# EAGLE board Rev B (Before Duplication) (EAGLE 6.5.0)
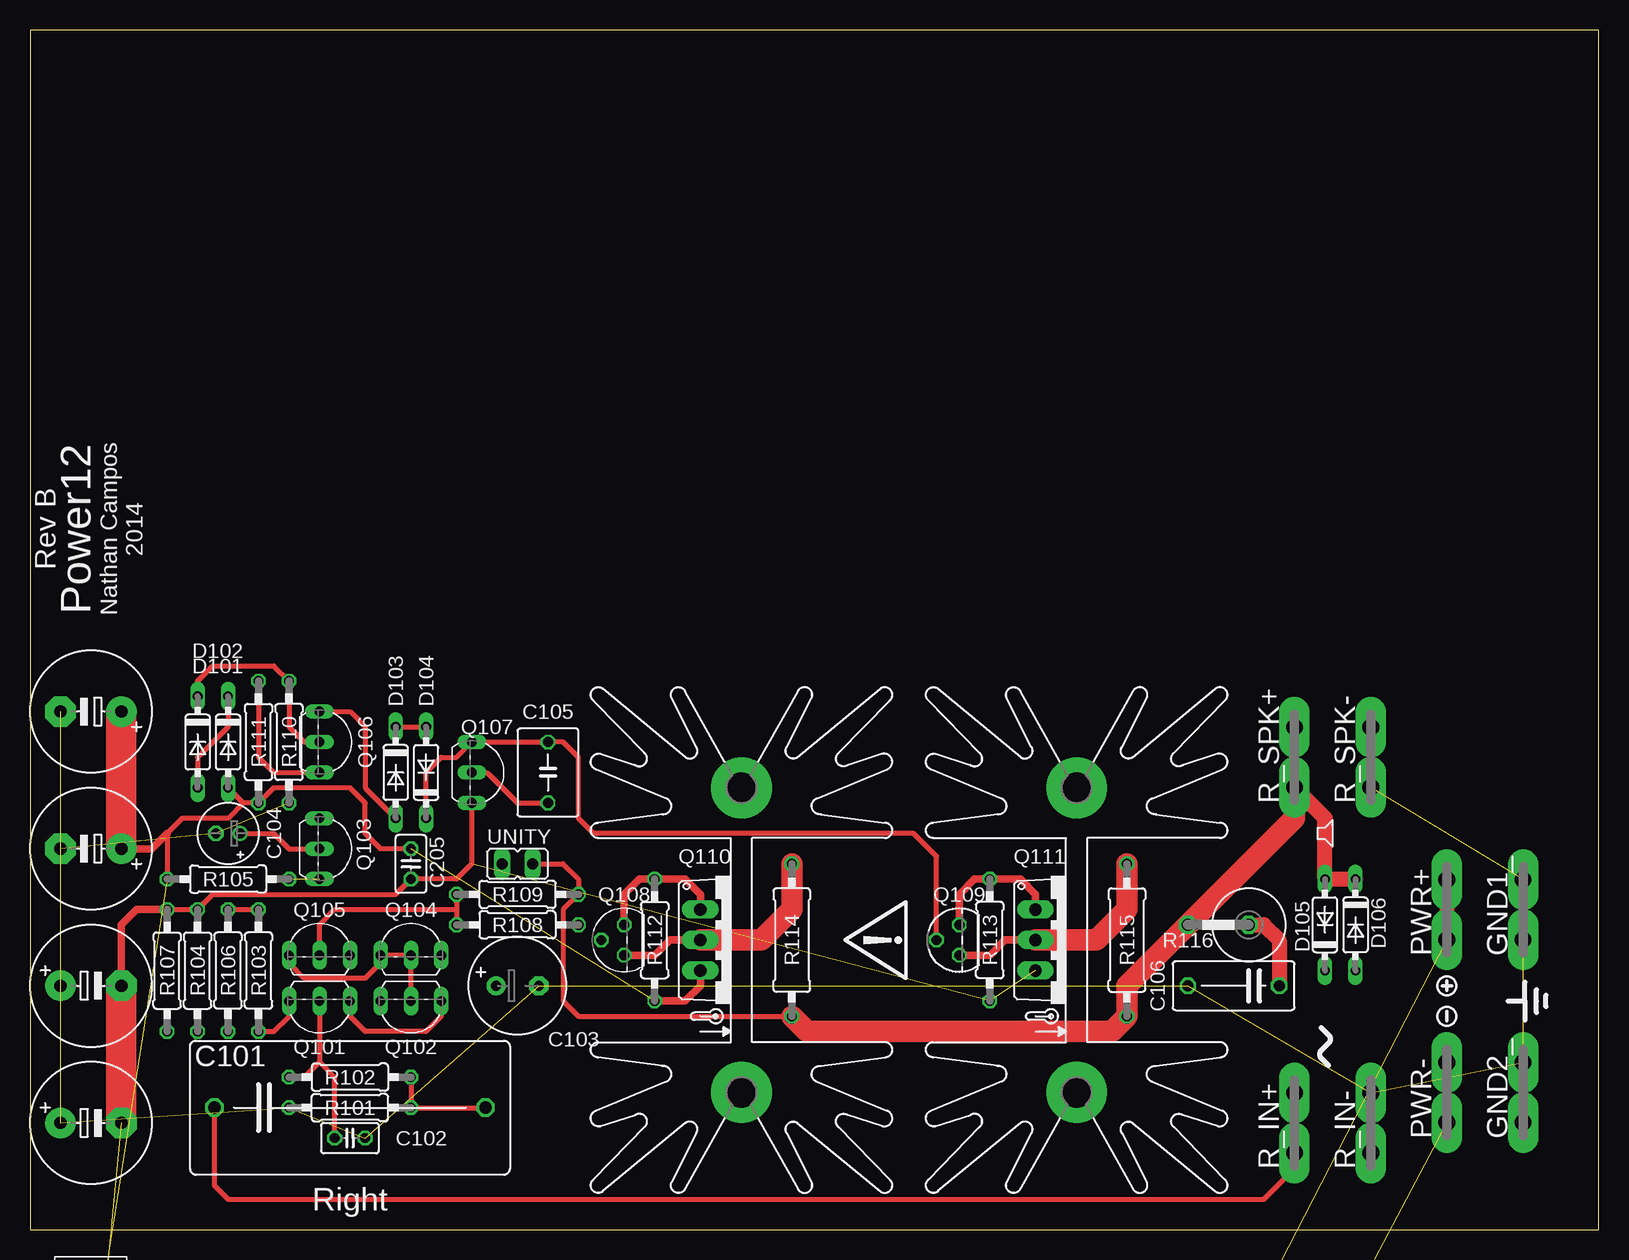
[diagram p0: board, top side]
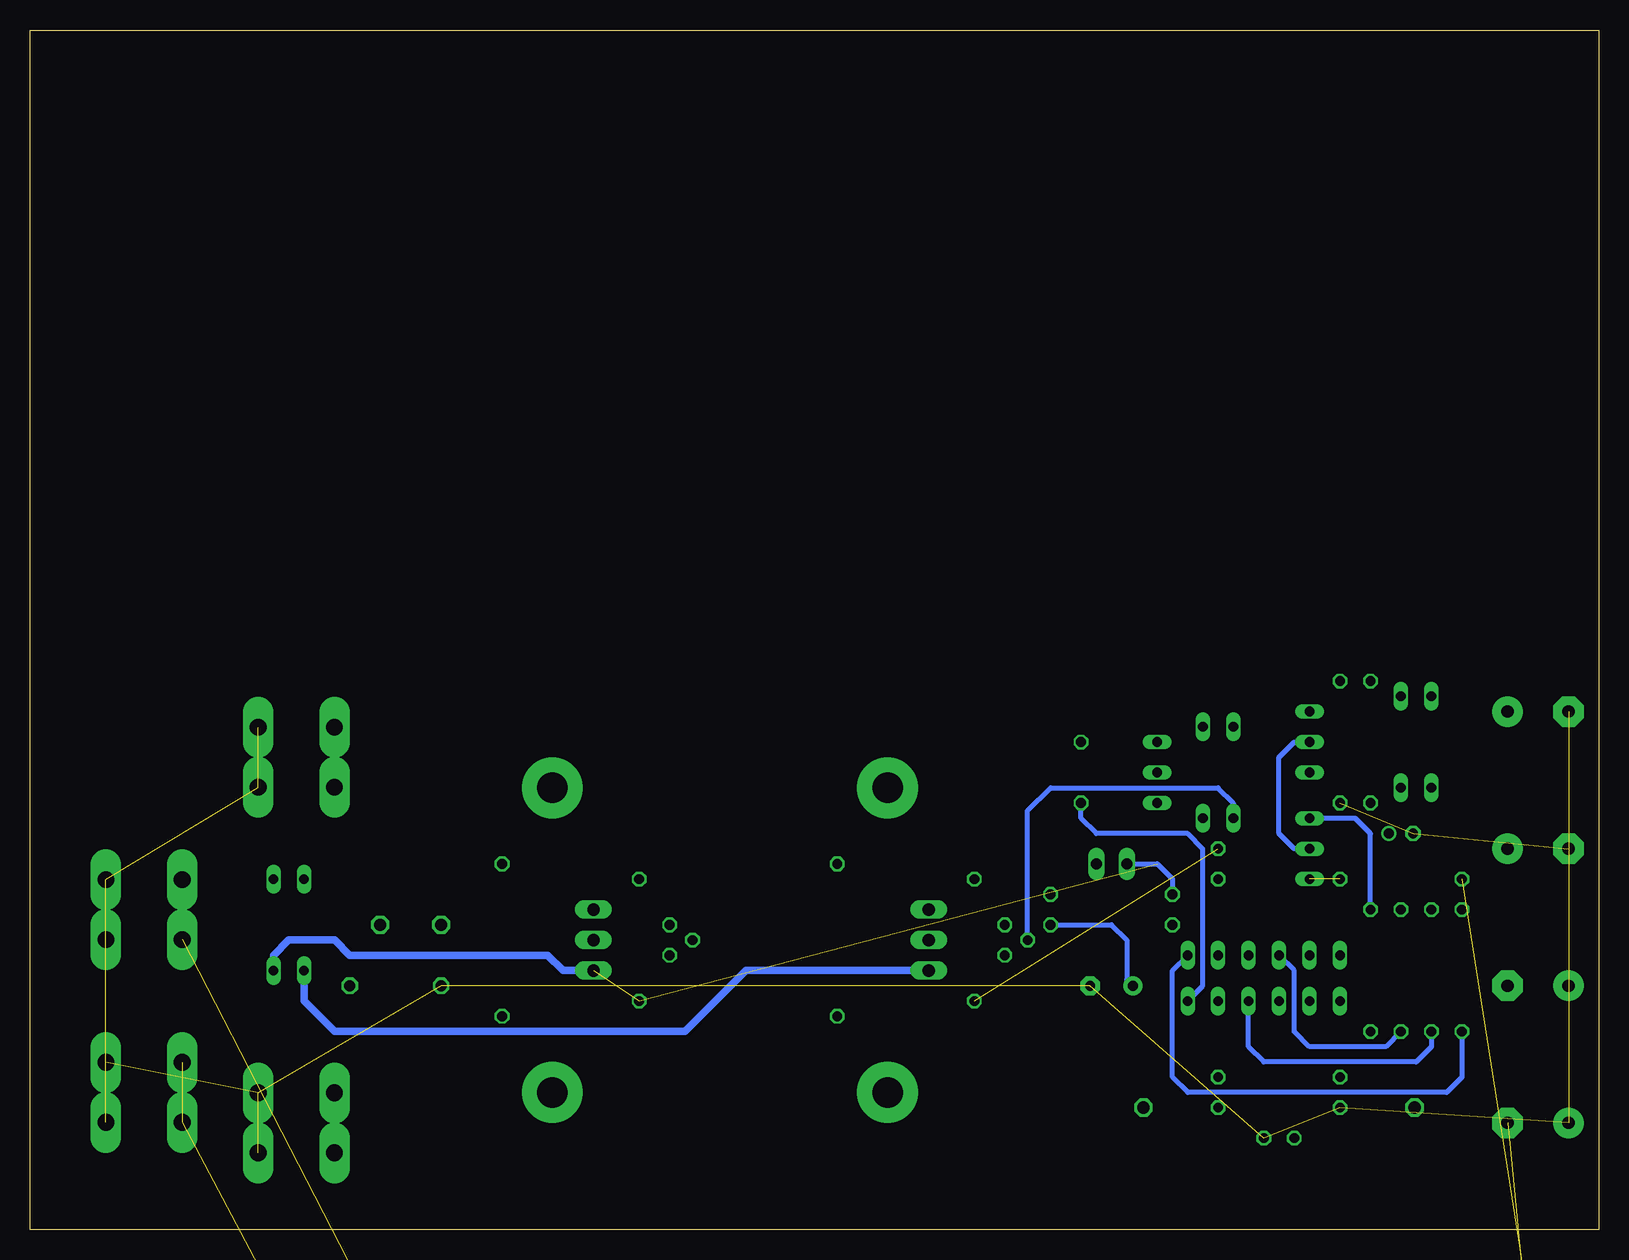
[diagram p1: board, bottom side, seen from below]

Size 130.79 x 100 mm. Coordinates in mm from the lower left corner, seen from the top.
Outline: 0,0 130.79,0 130.79,100 0,100 0,0
Copper layers (1*2*15*16): Top 0.035mm / dielectric 0.2mm / Route2 0.0175mm / dielectric 1.1mm / Route15 0.0175mm / dielectric 0.2mm / Bottom 0.035mm
Design rules "SeeedStudio_DRU_no_angle_20130527": minimum track width 6mil, minimum drill 12mil, track to track 6mil, track to pad 6mil, pad to pad 6mil, via to via 6mil, smd to smd 0mil, copper to edge 10mil, drill to drill 10mil, minimum pad ring 6mil, minimum via ring 6mil, stop-mask expansion 2mil, vias tented up to drill 25mil, thermal gap 10mil

## Footprints (pad centres in the part's own frame; a part is rotated, then mirrored left to right if it is on the bottom)
C225-113X268 = drill 1.016 octagon: 1 -11.303,0; 2 11.303,0
C025-025X050 = drill 0.813 octagon: 1 -1.27,0; 2 1.27,0
E3,5-8 = drill 0.813 pad 1.6: + -1.778,0 | drill 0.813 pad 1.6 octagon: - 1.778,0
E2-5 = drill 0.813 pad 1.27: + -1.016,0 | drill 0.813 pad 1.27 octagon: - 1.016,0
C050-050X075 = drill 0.813 octagon: 1 -2.54,0; 2 2.54,0
C075-042X103 = drill 0.914 octagon: 1 -3.81,0; 2 3.81,0
E5-10,5 = drill 1.016 pad 2.54: + -2.54,0 | drill 1.016 pad 2.54 octagon: - 2.54,0
DO35-7 = drill 0.813 long: A 3.81,0; C -3.81,0
F061.100 = drill 1.4 pad 2.54 long: A1 -2.5,0; A2 2.5,0
SK129 = drill 2.54 pad 5.08: A2,5 -12.7,-0.889; B2,5 12.7,-0.889
JST-PH-2-THM = drill 0.8 pad 1.422: 1 1,0; 2 -1,0
TO92-EBC = drill 0.813 long: B 0,-1.27; C -2.54,-1.27; E 2.54,-1.27
TO92 = drill 0.813 octagon: 1 1.27,0; 2 0,1.905; 3 -1.27,0
TO220AV = drill 1.016 long: B -2.54,-2.54; C 0,-2.54; E 2.54,-2.54
0207/10 = drill 0.813 octagon: 1 -5.08,0; 2 5.08,0
0309/12 = drill 0.813 octagon: 1 -6.35,0; 2 6.35,0
0617V = drill 1.016 octagon: 1 -2.54,0; 2 2.54,0
JP1 = drill 0.914 long: 1 0,-1.27; 2 0,1.27

## Placement (x,y rotation side)
C101  4.7uF  [C225-113X268]  26.67,10.16 0 top
C102  10nF  [C025-025X050]  26.67,7.62 0 top
C103  220uF  [E3,5-8]  40.64,20.32 0 top
C104  2.2uF  [E2-5]  16.51,33.02 180 top
C105  100pF  [C050-050X075]  43.18,38.1 90 top
C106  100n  [C075-042X103]  100.33,20.32 180 top
C201  2200uF  [E5-10,5]  5.08,20.32 0 top
C202  2200uF  [E5-10,5]  5.08,8.89 0 top
C203  2200uF  [E5-10,5]  5.08,31.75 180 top
C204  2200uF  [E5-10,5]  5.08,43.18 180 top
C205  100nF  [C025-025X050]  31.75,30.48 270 top
D101  1N4148DO35-7  [DO35-7]  16.51,40.64 270 top
D102  1N4148DO35-7  [DO35-7]  13.97,40.64 270 top
D103  1N4148DO35-7  [DO35-7]  30.48,38.1 270 top
D104  1N4148DO35-7  [DO35-7]  33.02,38.1 90 top
D105  1N4148DO35-7  [DO35-7]  107.95,25.4 90 top
D106  1N4148DO35-7  [DO35-7]  110.49,25.4 270 top
GND1_  PIN2F061.100  [F061.100]  124.46,26.67 90 top
GND2_  PIN2F061.100  [F061.100]  124.46,11.43 90 top
KK101  SK129-PAD  [SK129]  58.42,24.13 90 top
KK102  SK129-PAD  [SK129]  86.36,24.13 90 top
ON  [JST-PH-2-THM]  5.08,-5.08 0 top  (outside the outline)
PWR+  PIN2F061.100  [F061.100]  118.11,26.67 90 top
PWR-  PIN2F061.100  [F061.100]  118.11,11.43 90 top
Q101  BC560C  [TO92-EBC]  24.13,17.78 180 top
Q102  BC550B  [TO92-EBC]  31.75,17.78 180 top
Q103  BC560C  [TO92-EBC]  25.4,31.75 270 top
Q104  BC550B  [TO92-EBC]  31.75,24.13 0 top
Q105  BC560C  [TO92-EBC]  24.13,24.13 0 top
Q106  BC560C  [TO92-EBC]  25.4,40.64 270 top
Q107  BC550B  [TO92-EBC]  38.1,38.1 270 top
Q108  2N3904  [TO92]  49.53,24.13 90 top
Q109  2N3906  [TO92]  77.47,24.13 90 top
Q110  TIP42C  [TO220AV]  58.42,24.13 270 top
Q111  TIP41C  [TO220AV]  86.36,24.13 270 top
R101  10kΩ  [0207/10]  26.67,10.16 0 top
R102  100Ω  [0207/10]  26.67,12.7 180 top
R103  22Ω  [0207/10]  19.05,21.59 90 top
R104  56Ω  [0207/10]  13.97,21.59 270 top
R105  100Ω  [0207/10]  16.51,29.21 180 top
R106  22Ω  [0207/10]  16.51,21.59 90 top
R107  56Ω  [0207/10]  11.43,21.59 270 top
R108  560Ω  [0207/10]  40.64,25.4 180 top
R109  10kΩ  [0207/10]  40.64,27.94 0 top
R110  4.7kΩ  [0207/10]  21.59,40.64 90 top
R111  560  [0207/10]  19.05,40.64 270 top
R112  1kΩ  [0207/10]  52.07,24.13 270 top
R113  1kΩ  [0207/10]  80.01,24.13 90 top
R114  0.33Ω  [0309/12]  63.5,24.13 90 top
R115  0.33Ω  [0309/12]  91.44,24.13 270 top
R116  10Ω  [0617V]  99.06,25.4 180 top
R201  4.7kΩ  [0207/10]  -8.89,-214.63 0 top  (outside the outline)
R_IN+  PIN2F061.100  [F061.100]  105.41,8.89 90 top
R_IN-  PIN2F061.100  [F061.100]  111.76,8.89 90 top
R_SPK+  PIN2F061.100  [F061.100]  105.41,39.37 90 top
R_SPK-  PIN2F061.100  [F061.100]  111.76,39.37 90 top
SWT_IN+  PIN2F061.100  [F061.100]  -10.16,-219.71 0 top  (outside the outline)
SWT_IN-  PIN2F061.100  [F061.100]  -10.16,-228.6 0 top  (outside the outline)
SWT_OUT+  PIN2F061.100  [F061.100]  -10.16,-237.49 0 top  (outside the outline)
SWT_OUT-  PIN2F061.100  [F061.100]  -10.16,-246.38 0 top  (outside the outline)
U$1  [ICON_SPEAKER]  107.95,33.02 0 top
U$2  [ICON_GND2]  125.73,19.05 90 top
U$3  [ICON_PLUS]  118.11,20.32 90 top
U$4  [ICON_MINUS]  118.11,17.78 90 top
U$5  [ICON_TEMP]  85.09,17.78 90 top
U$6  [ICON_TEMP]  57.15,17.78 90 top
U$7  [ICON_AC]  107.95,15.24 90 top
U$9  [ICON_EXL-S]  71.12,24.13 90 top
UNITY  [JP1]  40.64,30.48 270 top

## Library data of the parts
C101-C106 C201-C205 R101-R116 R201 = rcl
D101-D106 = diode
GND1_ GND2_ PWR+ PWR- R_IN+ R_IN- R_SPK+ R_SPK- SWT_IN+ SWT_IN- SWT_OUT+ SWT_OUT- = con-faston; OC_FARNELL: unknown; OC_NEWARK: unknown
KK101 KK102 = heatsink
ON = adafruit
Q101 Q103 Q105 Q106 Q109 = transistor-pnp
Q102 Q104 Q107 Q108 = transistor-npn
Q110 Q111 = transistor-power
U$1-U$7 U$9 = dicons
UNITY = jumper

## Nets
GND: C102.2 C103.- C104.- C106.2 C201.+ C202.+ C203.- C204.- GND1_.A1 GND1_.A2 GND2_.A1 GND2_.A2 R101.1 R110.1 R_IN-.A1 R_IN-.A2 R_SPK-.A1 R_SPK-.A2
N$1: D103.A Q106.C Q108.2
N$2: Q105.E R106.1
N$3: Q102.B Q104.B Q104.C Q105.C
N$4: C102.1 Q101.B R102.2
N$5: C101.2 R101.2 R102.1
N$6: C104.+ D102.C Q103.B Q106.B R110.2
N$7: C101.1 R_IN+.A1 R_IN+.A2
N$8: C105.1 Q101.C Q102.C Q107.B
N$9: D101.C D102.A
N$10: ON.2 R201.2
N$11: Q106.E R111.1
N$12: C103.+ R108.1
N$13: Q102.E R104.2
N$14: Q104.E R107.2
N$16: C106.1 R116.1
N$18: Q101.E R103.1
N$19: Q103.C R103.2 R106.2
N$20: Q103.E R105.1
N$24: D103.C D104.A
N$26: Q108.1 Q110.B R112.1
N$27: Q109.1 Q111.B R113.2
N$28: Q109.3 Q111.C R115.1
N$29: Q108.3 Q110.C R114.2
N$31: C105.2 D104.C Q107.C Q109.2
N$32: Q105.B R108.2 R109.1 UNITY.1
R_OUT: D105.A D106.C R109.2 R114.1 R115.2 R116.2 R_SPK+.A1 R_SPK+.A2 UNITY.2
SWTIN+: PWR+.A1 PWR+.A2 SWT_IN+.A1 SWT_IN+.A2
SWTIN-: PWR-.A1 PWR-.A2 SWT_IN-.A1 SWT_IN-.A2
V+: C203.+ C204.+ C205.1 D101.A D105.C ON.1 Q110.E R105.2 R111.2 R112.2 SWT_OUT+.A1 SWT_OUT+.A2
V-: C201.- C202.- C205.2 D106.A Q107.E Q111.E R104.1 R107.1 R113.1 R201.1 SWT_OUT-.A1 SWT_OUT-.A2

## Tracks (layer width: path | path; a pad name or v marks a point on that pad's centre or on a via)
GND  (17 unrouted)
N$1
  Top 0.406: Q106.C 26.67,43.18 27.94,41.91 27.94,36.83 D103.A
  Bottom 0.406: Q108.2 47.62,34.92 45.72,36.83 31.75,36.83 30.48,35.56 D103.A
N$2
  Bottom 0.406: R106.1 17.78,15.24 24.13,15.24 25.4,16.51 25.4,21.59 Q105.E
N$3
  Top 0.406: Q102.B Q104.B Q104.C 29.21,22.23 27.94,20.95 22.86,20.95 21.59,22.23 Q105.C
N$4
  Top 0.406: Q101.B 24.13,13.97 | 24.13,13.97 22.86,12.7 R102.2 | C102.1 25.4,12.7 24.13,13.97
N$5
  Top 0.406: C101.2 R101.2 R102.1
N$6
  Top 0.406: D102.C 13.97,45.72 15.24,46.99 20.32,46.99 R110.2 21.59,41.91 22.86,40.64 Q106.B | C104.+ 20.32,33.02 21.59,31.75 Q103.B
  Bottom 0.406: Q103.B 25.4,31.75 26.67,33.02 26.67,39.37 25.4,40.64 Q106.B
N$7
  Top 0.406: R_IN+.A2 R_IN+.A1 105.41,5.08 102.87,2.54 16.51,2.54 15.37,3.68 C101.1
N$8
  Top 0.406: Q107.B 38.1,38.1 40.64,35.56 C105.1 | Q102.C 34.29,17.78 33.02,16.51 27.94,16.51 26.67,17.78 Q101.C
  Bottom 0.406: Q102.C 33.02,20.32 33.02,31.75 34.29,33.02 41.91,33.02 43.18,34.29 C105.1
N$9
  Top 0.406: D101.C 16.51,41.91 13.97,39.37 D102.A
N$10  (1 unrouted)
N$11
  Top 0.406: R111.1 19.05,39.37 20.32,38.1 Q106.E
N$12
  Bottom 0.406: R108.1 40.64,25.4 39.37,24.13 39.37,20.83 C103.+
N$13
  Bottom 0.406: R104.2 13.97,15.24 15.24,13.97 27.94,13.97 29.21,15.24 Q102.E
N$14
  Bottom 0.406: R107.2 11.43,12.7 12.7,11.43 34.29,11.43 35.56,12.7 35.56,21.59 Q104.E
N$16
  Top 1.27: R116.1 102.87,25.4 104.14,24.13 C106.1
N$18
  Top 0.406: R103.1 20.32,16.51 21.59,17.78 Q101.E
N$19
  Top 0.406: R106.2 R103.2
  Bottom 0.406: R103.2 19.05,33.02 20.32,34.29 Q103.C
N$20  (1 unrouted)
N$24
  Top 0.406: D103.C D104.A
N$26
  Top 0.61: Q108.1 49.53,27.94 50.8,29.21 R112.1 54.61,29.21 55.88,27.94 Q110.B
N$27
  Top 0.61: Q111.B 83.82,27.94 82.55,29.21 R113.2 78.74,29.21 77.47,27.94 Q109.1
N$28
  Top 0.61: Q109.3 80.01,22.86 81.28,24.13 Q111.C
  Top 1.778: R115.1 91.44,26.67 88.9,24.13 Q111.C
N$29
  Top 0.61: Q108.3 52.07,22.86 53.34,24.13 Q110.C
  Top 1.778: R114.2 63.5,26.67 60.96,24.13 Q110.C
N$31
  Top 0.406: D104.C 33.02,38.1 34.29,39.37 35.56,39.37 Q107.C C105.2 44.45,40.64 45.72,39.37 45.72,34.29 46.99,33.02 73.66,33.02 75.56,31.11 Q109.2
N$32
  Top 0.406: R109.1 35.56,26.67 | 35.56,26.67 R108.2 | Q105.B 24.13,25.4 25.4,26.67 35.56,26.67
  Bottom 0.406: UNITY.1 36.83,30.48 35.56,29.21 R109.1
R_OUT
  Top 0.406: UNITY.2 44.45,30.48 45.72,29.21 R109.2 44.45,26.67 44.45,19.05 45.72,17.78 R114.1
  Top 0.813: R_SPK+.A1 R_SPK+.A2
  Top 1.27: R_SPK+.A1 107.95,34.33 D105.A D106.C
  Top 1.778: R114.1 64.77,16.51 90.17,16.51 R115.2 91.44,20.32 R116.2 105.41,34.29 R_SPK+.A1
SWTIN+  (2 unrouted)
  Top 1.27: PWR+.A2 PWR+.A1
SWTIN-  (3 unrouted)
V+  (4 unrouted)
  Top 0.406: 17.78,35.56 R111.2 20.32,36.83 26.67,36.83 27.94,35.56 27.94,33.02 29.21,31.75 C205.1 | 17.78,35.56 D101.A | 17.78,35.56 16.51,34.29 12.7,34.29 11.43,33.02 R105.2
  Top 0.61: C203.+ 10.16,31.75 11.43,33.02 | R112.2 54.61,19.05 55.88,20.32 Q110.E
  Top 2.54: C204.+ C203.+
  Bottom 0.61: Q110.E 71.12,21.59 76.2,16.51 105.41,16.51 107.95,19.05 D105.C
V-  (5 unrouted)
  Top 0.406: R107.1 R104.1 15.24,27.94 30.48,27.94 C205.2 35.56,29.21 36.83,30.48 Q107.E
  Top 0.61: R107.1 8.89,26.67 7.62,25.4 C201.-
  Top 2.54: C201.- C202.-
  Bottom 0.61: D106.A 110.49,22.86 109.22,24.13 105.41,24.13 104.14,22.86 87.63,22.86 86.36,21.59 Q111.E

## Text on the board
tPlace: Rev B | Power12 | Nathan Campos / 2014 | Right